# Altium PCB SOLA0001_Solar_Array.PcbDoc
Units mm, origin at the board's own origin, x right, y up, seen from the top; angles counter-clockwise.
Board outline 215 x 220 mm, 2 copper layers (Top Layer, Bottom Layer), stack 0.571 mm thick; 13 components, 4 nets, 14 pads, 10 vias.
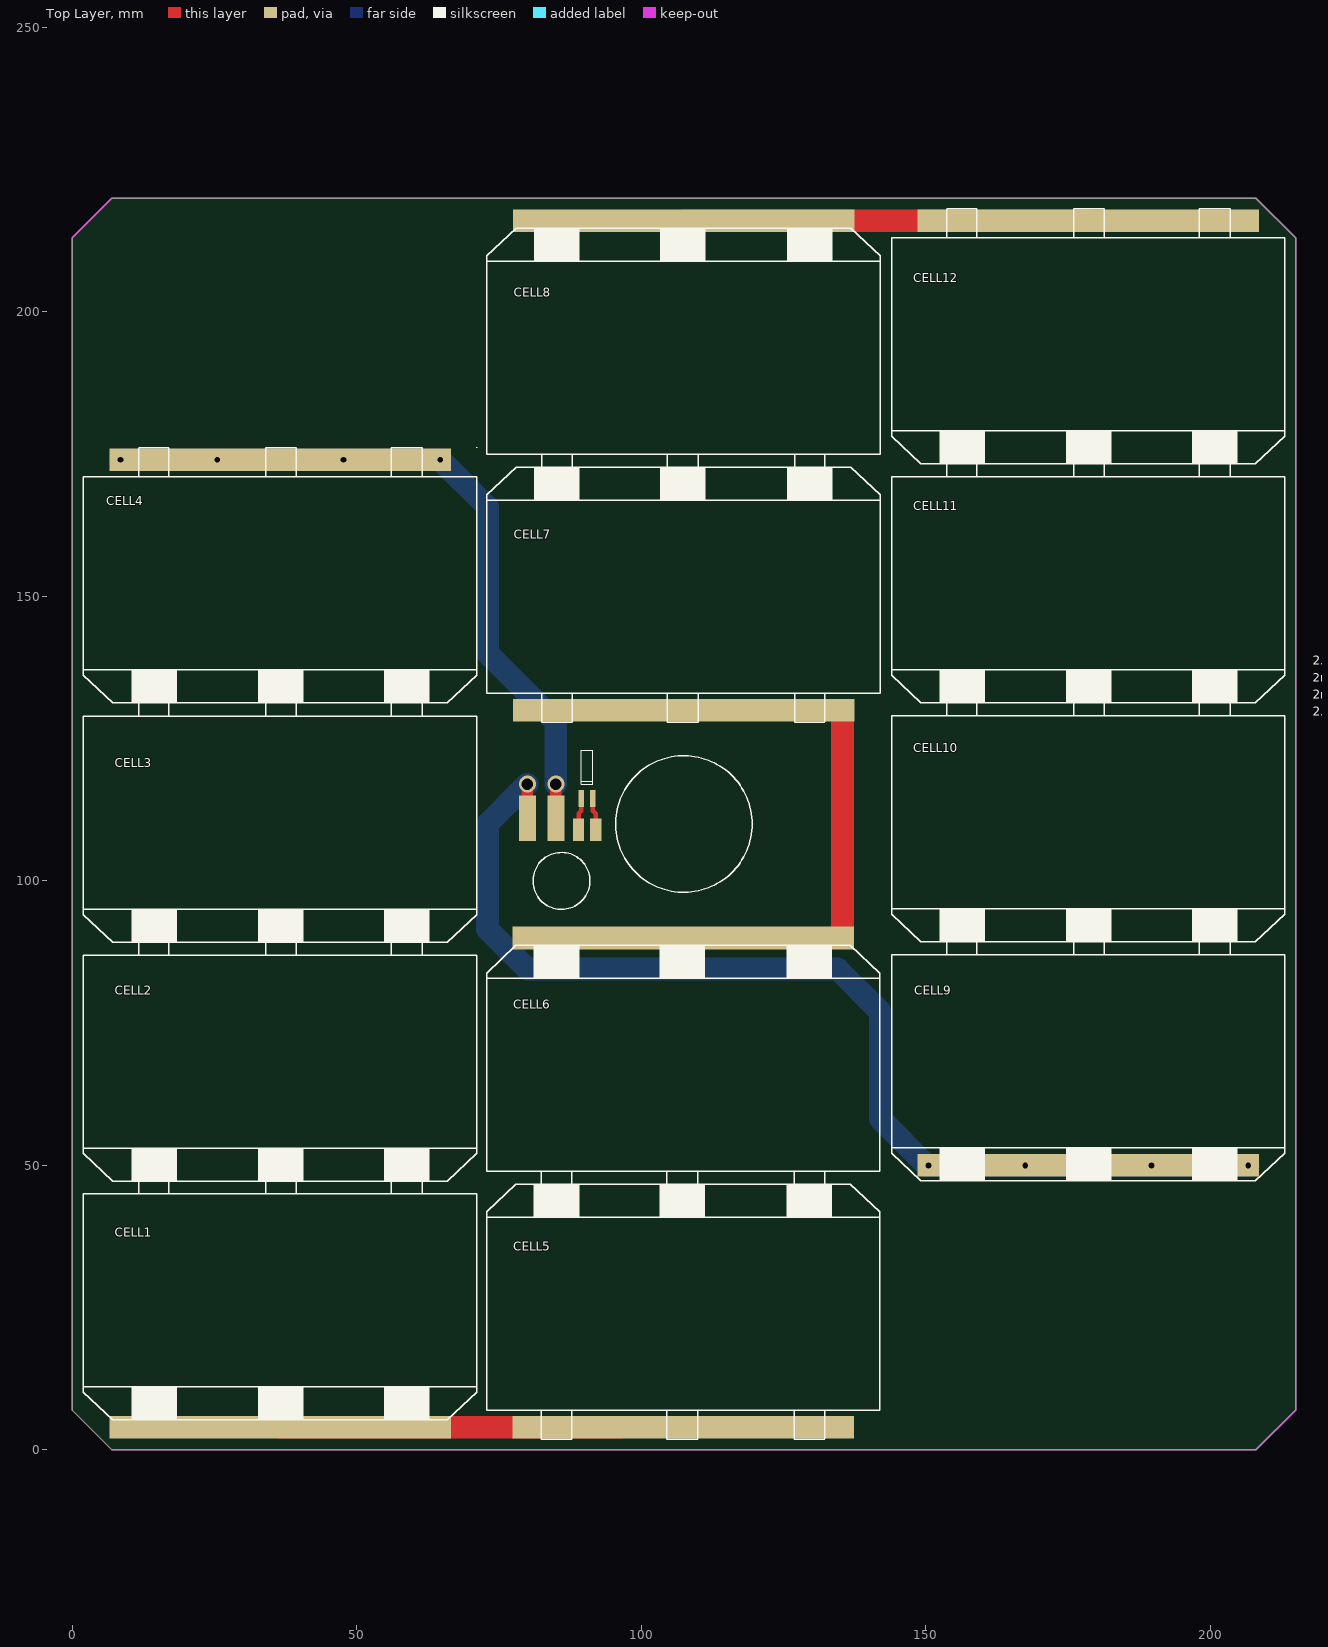
[diagram p0: Top Layer view]
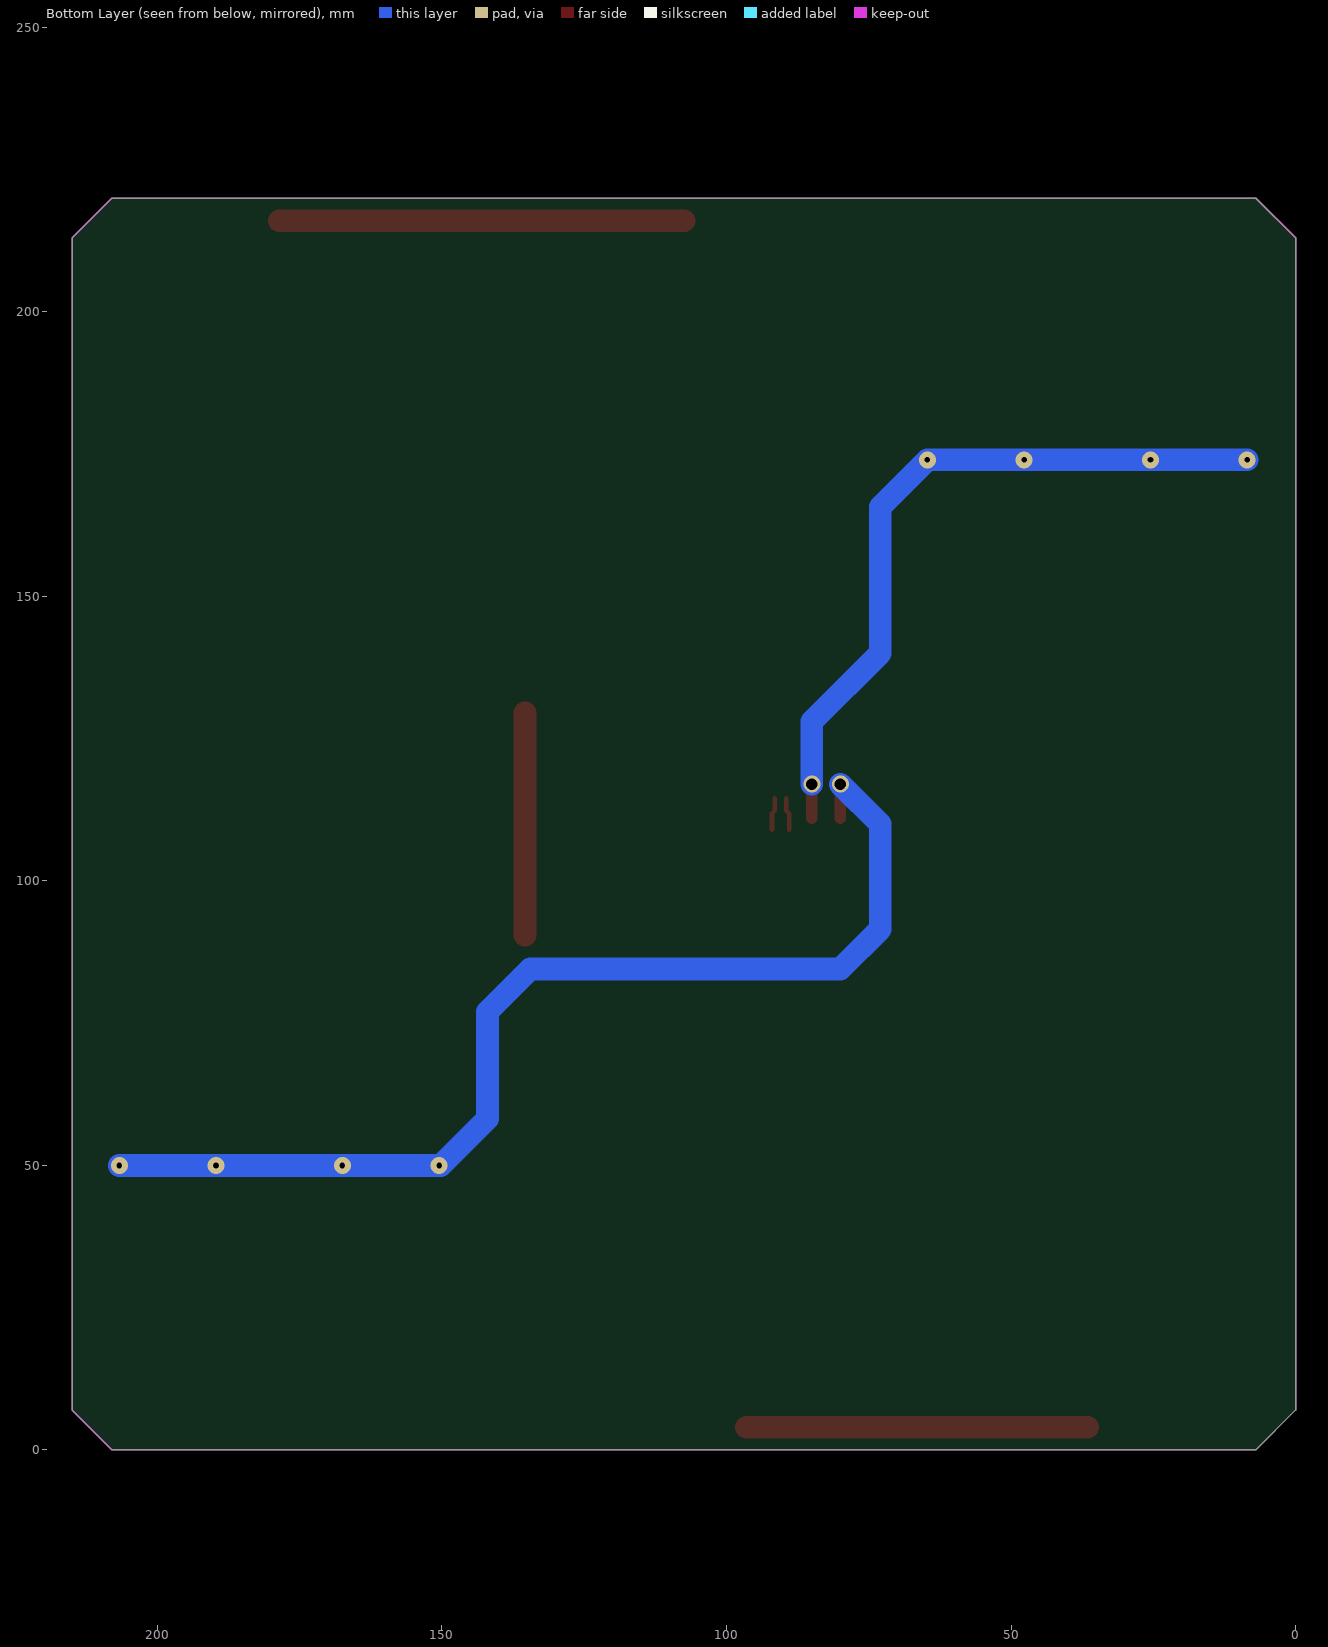
[diagram p1: Bottom Layer view, seen from below]

## Layer stack, top to bottom
Top Layer: signal copper 0.0356
Dielectric: core 0.5, FR-4, Dk 4.8
Bottom Layer: signal copper 0.0356

## Board outline
208,0 215,7 215,213 208,220 7,220 0,213 0,7 7,0

## Design rules (kind name [scope] priority, off if disabled: settings)
Clearance [All] p1 off: gap=1
ComponentClearance [All] p1 off: gap=0.254 collisioncheckmode=3 verticalgap=0.254 showdistances=FALSE
FabricationTestPointUsage TestPointUsage [All] p1: valid=0 allowmultiple=FALSE
FabricationTestpoint Testpoint [All] p1: side=3 testpointundercomponent=TRUE minsize=1.016 maxsize=2.54 preferedsize=1.524 minholesize=0 maxholesize=1.016 preferedholesize=0.813 testpointgrid=0.025 allowsidetop=TRUE allowsidebottom=TRUE usegrid=TRUE gridtolerance=0
NetAntennae [All] p1 off: netantennaetolerance=0
PlaneClearance [All] p1: clearance=3
PolygonConnect [All] p1: connectstyle=Relief reliefconductorwidth=0.254 reliefentries=4 polygonreliefangle="90 Angle"
RoutingVias [All] p1: holewidth=0.711 width=1.27 viastyle="Through Hole" minholewidth=0.711 minwidth=1.27 maxholewidth=0.711 maxwidth=1.27
ShortCircuit [All] p1 off: allowed=FALSE
SilkToSilkClearance [All] p1 off: silktosilkclearance=0.254
SilkscreenOverComponentPads [All] p1: minsilkscreentomaskgap=0.254
SolderMaskExpansion [All] p1: expansion=0.102
Width [All] p1: maxlimit=4 minlimit=0.4 preferedwidth=4 toplayer_prefwidth=0.8 minimp=50.000000 maximp=50.000000 favimp=50.000000
20 further rules are at their usual default settings.

## Components (designator, comment, footprint, x,y, rotation, side; value= is the part's Value field where it differs from the comment)
CELL1 "" "Solar Cell - Bottom extra" 2,45 r0 top
CELL2 "" "Solar Cell" 2,86.95 r0 top
CELL3 "" "Solar Cell" 2,128.9 r0 top
CELL4 "Comment" "Solar Cell - Top link, vias" 2,171 r0 top
CELL5 "" "Solar Cell - Top link" 141.925,7 r180 top
CELL6 "" "Solar Cell - Bottom extra" 141.925,48.95 r180 top
CELL7 "" "Solar Cell - Top link" 142,133 r180 top
CELL8 "" "Solar Cell - Bottom extra" 142,175 r180 top
CELL9 "Comment" "Solar Cell - Bottom link, vias" 144,87 r0 top
CELL10 "" "Solar Cell" 144,129 r0 top
CELL11 "" "Solar Cell" 144,171 r0 top
CELL12 "" "Solar Cell - Top link" 144,213 r0 top
? "" AD590_v2 90.5,120 r90 top

## Footprints (in the part's own frame and the unit in brackets; to place one, negate y for a bottom-side part, rotate by r counter-clockwise, add the part's x,y. Pads: shape width x height; smd on the part's side, far side on the other; paste and mask are expansions set on the pad)
AD590_v2 [mm]
  rect 3x1 smd: 1(-5.5,1) 2(-5.5,-1)
  silkscreen extent -3,-1 3,1
"Solar Cell" [mm]
  silkscreen extent 0,-39.7 69.1,5.1
"Solar Cell - Bottom extra" [mm]
  rect 60x4 smd: 1(34.55,-41)
  silkscreen extent 0,-39.7 69.1,5.1
"Solar Cell - Bottom link, vias" [mm]
  rect 60x4 smd: 1(34.55,-36.95)
  silkscreen extent 0,-39.7 69.1,5.1
"Solar Cell - Top link" [mm]
  rect 60x4 smd: 1(34.55,3)
  silkscreen extent 0,-39.7 69.1,5.1
"Solar Cell - Top link, vias" [mm]
  rect 60x4 smd: 1(34.55,3)
  silkscreen extent 0,-39.7 69.1,5.2

## Free pads (board coordinates)
  rect 3x8 smd: 5(80,111) 6(85,111)
  rect 2x4 smd: 7(89,109) 8(92,109)

## Via types
v1: diameter 3, hole 1, Top Layer to Bottom Layer, 8 vias
v2: diameter 3, hole 2, Top Layer to Bottom Layer, 2 vias

## Nets (pads, with @x,y where several pads share a name; then routed paths per layer and width w, separated by ;. In a path a pad name is that pad's centre, name@x,y a point inside that pad or via, vN(x,y) a via of type N, cw(c..) or ccw(c..) an arc to the next point about the centre after c; other vN are vias at no path point)
Isolated: CELL8.1 CELL12.1 | length 71.1
  Top Layer w4: CELL8.1 CELL12.1
Isolated_2: 
NegSupply: 
PosSupply: 
pads on no net: ?.1 ?.2 CELL1.1 CELL4.1 CELL5.1 CELL6.1 CELL7.1 CELL9.1
copper on no net: | length 434.3
  Top Layer w0.8: 89,109 89,111.846 89.5,112.346 89.5,114.5 ; 91.5,114.5 91.5,112.346 92,111.846 92,109
  Top Layer w2: 80,111 v2(80,117) ; 85,111 v2(85,117)
  Top Layer w4: 36.55,4 96.5,4 ; 135.4,90.5 135.4,129.5
  Bottom Layer w4: v1(8.5,174) v1(64.7,174) 73,165.7 73,146 73,140 85,128 v2(85,117) ; v2(80,117) 73,110 73,91.5 80,84.5 134.5,84.5 142,77 142,58.2 150.2,50 v1(206.7,50)
  other v1: 150.5,50 167.5,50 189.7,50 25.5,174 47.7,174

## Keep-outs
Keep-Out Layer:
  lines w0.254: 0,7 0,213 7,220 208,220 215,213 215,7 208,0 7,0

## Silkscreen, mask and mechanical layers (free items; w line width, h text height)
Top Overlay:
  circle w0.254: c107.5,110 r12
  circle w0.254: c86,100 r5
  text "2.2mm clearance from top edge" at 218,138 h1.52
  text "2mm clearance from bottom edge" at 218,135 h1.5
  text "2mm clearance from left edge" at 218,132 h1.52
  text "2.25mm clearance from right edge" at 218,129 h1.52
Mechanical 1:
  the board outline again, w0.254